# Altium PCB ATmega1284p_breakout.PcbDoc
Units mil, origin at the board's own origin, x right, y up, seen from the top; angles counter-clockwise.
Board outline 2600 x 4350 mil, 2 copper layers (Top Layer, Bottom Layer); 30 components, 44 nets, 167 pads, 48 vias.
Unrouted connection lines stored in the file: 51.
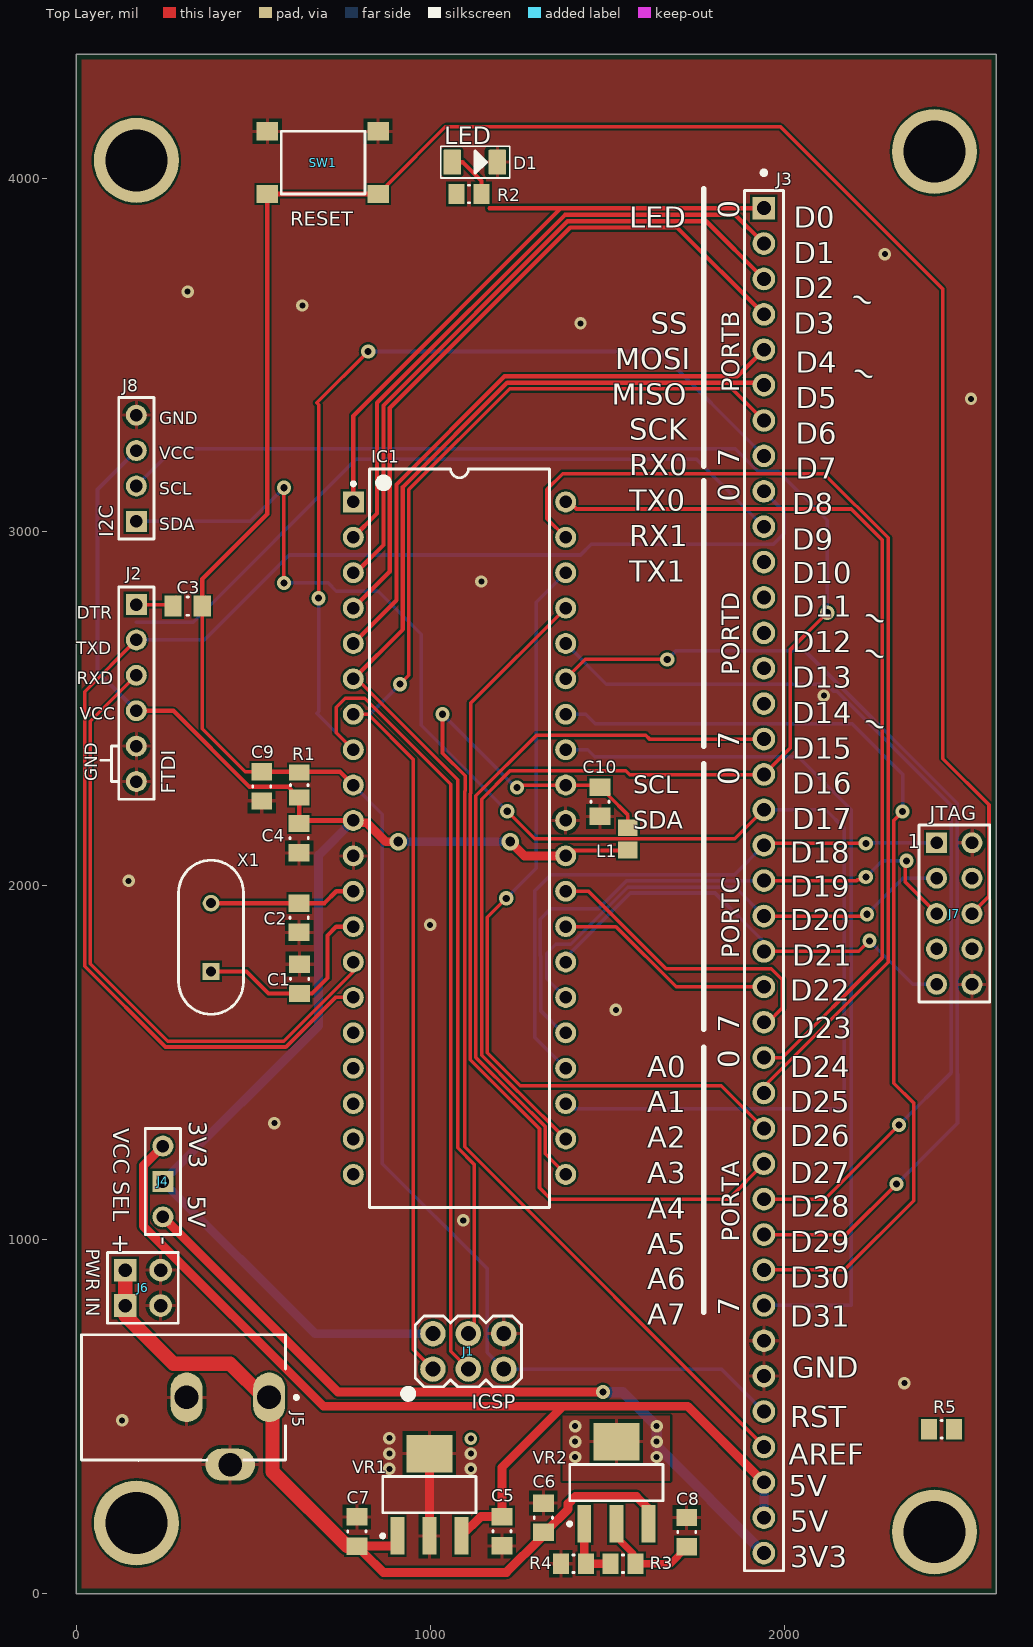
[diagram p0: Top Layer view]
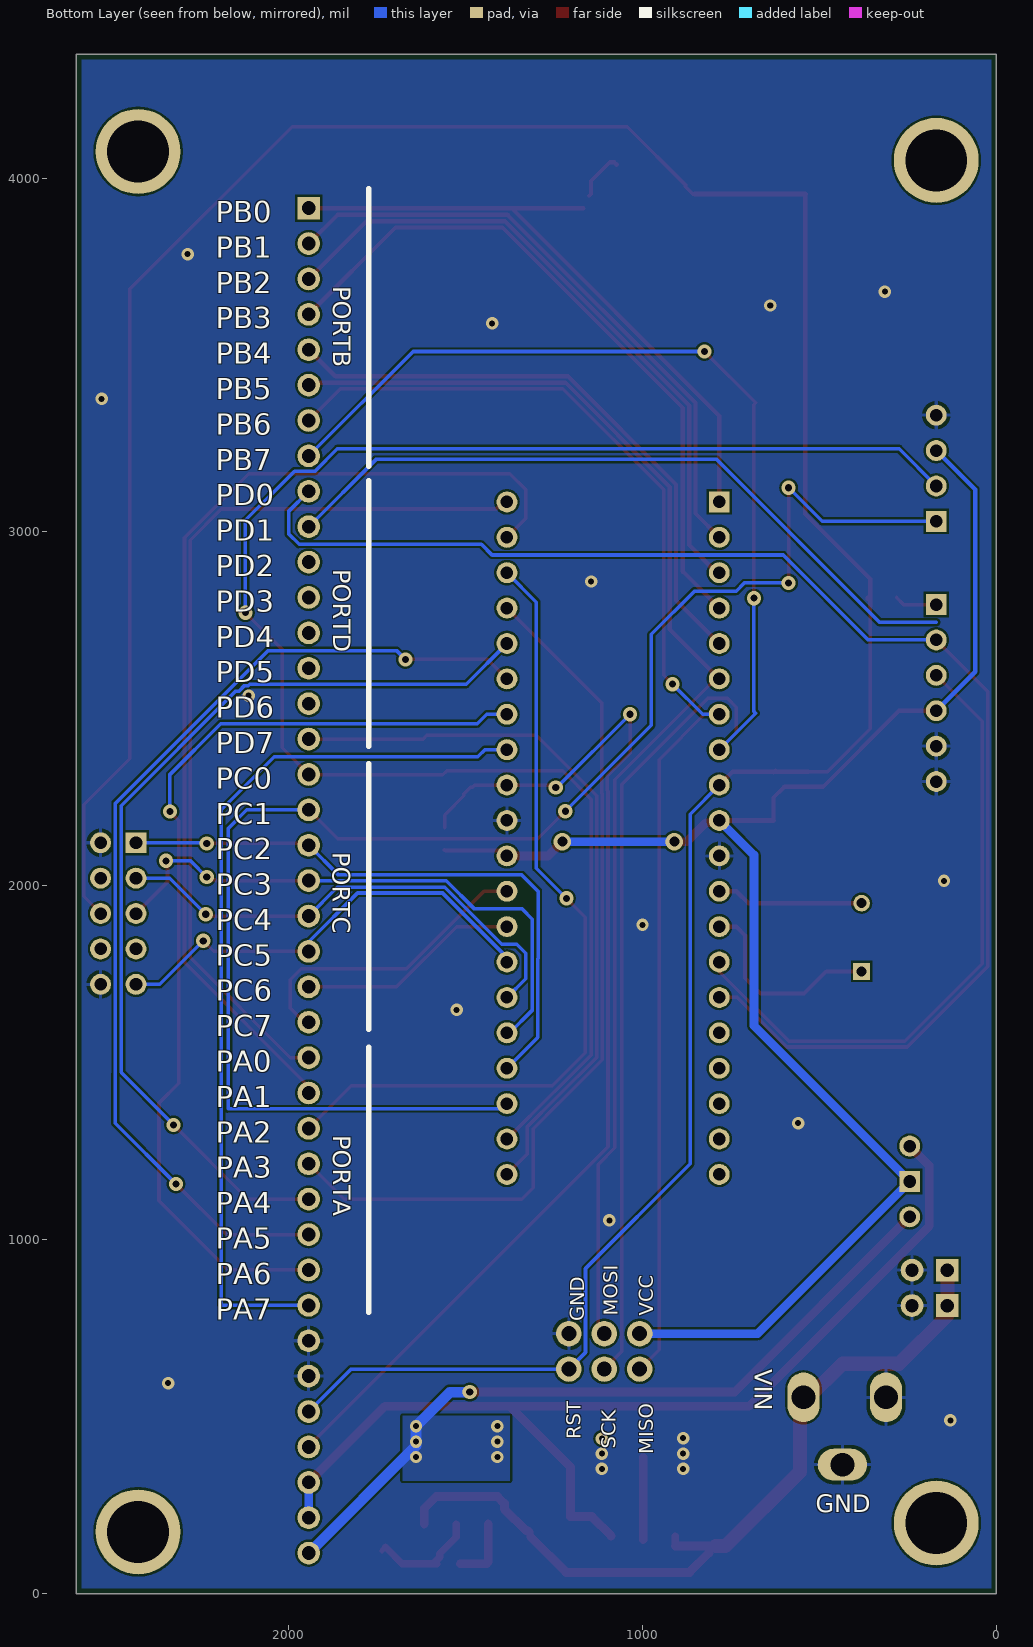
[diagram p1: Bottom Layer view, seen from below]

## Layer stack, top to bottom
Top Solder: solder mask 0.4, Solder Resist, Dk 3.5
Top Layer: signal copper 1.4
Dielectric 1: dielectric 12.6, FR-4, Dk 4.8
Bottom Layer: signal copper 1.4
Bottom Solder: solder mask 0.4, Solder Resist, Dk 3.5

## Board outline
0,0 2600,0 2600,4350 0,4350

## Design rules (kind name [scope] priority, off if disabled: settings)
BoardOutlineClearance [All] p1: gap=15 ignorepadtopadclearanceinfootprint=FALSE
Clearance [All] p1: gap=6 ignorepadtopadclearanceinfootprint=FALSE
PolygonConnect [IsVia] p1: connectstyle=Direct reliefconductorwidth=10 reliefentries=4 polygonreliefangle="90 Angle" airgapwidth=10
PolygonConnect PolygonConnect_1 [All] p2: connectstyle=Relief reliefconductorwidth=10 reliefentries=4 polygonreliefangle="90 Angle" airgapwidth=10
RoutingVias [All] p1: holewidth=28 width=50 viastyle="Through Hole" minholewidth=28 minwidth=50 maxholewidth=28 maxwidth=50
SolderMaskExpansion [All] p1: expansion=4
Width [All] p1: maxlimit=100 minlimit=10 preferedwidth=10
30 further rules are at their usual default settings.

## Components (designator, comment, footprint, x,y, rotation, side; value= is the part's Value field where it differs from the comment)
C1 "Cap Semi" RESC0805(2012)_M 631.34,1737.46 r270 top value=22pF
C2 "Cap Semi" RESC0805(2012)_M 630,1910 r90 top value=22pF
C3 "Cap Semi" RESC0805(2012)_M 315,2790.47 r0 top value=100n
C4 "Cap Semi" RESC0805(2012)_M 630,2135 r90 top value=100n
C5 "Cap Semi" RESC0805(2012)_M 1202.99,176.97 r90 top value=100n
C6 "Cap Semi" RESC0805(2012)_M 1320,215 r270 top value=100n
C7 "Cap Semi" RESC0805(2012)_M 792.99,176.34 r270 top value=100n
C8 "Cap Semi" RESC0805(2012)_M 1725,174.37 r270 top value=100n
C9 "Cap Semi" RESC0805(2012)_M 524.33,2281.34 r90 top value=10nF
C10 "Cap Semi" RESC0805(2012)_M 1480,2238.03 r90 top value=100n
D1 "LED" LED-0805 1105,4045 r0 top
IC1 "ATmega1284P-PU" 40P6 1082.99,2135 r0 top locked
J1 "ICSP" ICSP 1007.99,635 r180 top
J2 "FTDI" HDR1X6 170,2795 r270 top
J3 "Header38" HEADER38 1942.99,3815 r0 top locked
J4 "VCC SEL" HDR1X3 245,1065 r90 top
J5 "DC-005" BARREL 435,555 r270 top
J6 "PWR IN" HDR2X2 138.47,914.45 r270 top
J7 "JTAG" HDR2X5 2431,2122 r270 top
J8 "I2C" HDR1X4 170,3030 r90 top
L1 "Inductor" 2029 1559,2133.03 r90 top value=10mH
R1 "RES_0805" CAPC0805(2012)75_N 630,2285 r270 top value=10k
R2 "RES_0805" CAPC0805(2012)75_N 1110,3955 r180 top value=330
R3 "RES_0805" CAPC0805(2012)75_N 1545,84.9 r0 top value=2k
R4 "RES_0805" CAPC0805(2012)75_N 1405,85 r0 top value=3k
R5 "RES_0805" CAPC0805(2012)75_N 2445,465 r0 top value=IM
SW1 "RESET" TACT_SW 540,4132.17 r0 top
VR1 "LDL1117S50R" SOT223_M 997.99,280 r90 top
VR2 "LM117" SOT223_M 1526.1,313.86 r90 top
X1 "16MHz" CRYSTAL 381.04,1855 r90 top

## Footprints (in the part's own frame and the unit in brackets; to place one, negate y for a bottom-side part, rotate by r counter-clockwise, add the part's x,y. Pads: shape width x height; smd on the part's side, far side on the other; paste and mask are expansions set on the pad)
40P6 [mm] "40-Pin Ceramic Dual In-Line Package (CerDIP)"
  rect 1.5x1.5 hole 0.9: 1(-7.62,24.13)
  round 1.5 hole 0.9: 2(-7.62,21.59) 3(-7.62,19.05) 4(-7.62,16.51) 5(-7.62,13.97) 6(-7.62,11.43) 7(-7.62,8.89) 8(-7.62,6.35) 9(-7.62,3.81) 10(-7.62,1.27) 11(-7.62,-1.27) 12(-7.62,-3.81) 13(-7.62,-6.35) 14(-7.62,-8.89) 15(-7.62,-11.43) 16(-7.62,-13.97) 17(-7.62,-16.51) 18(-7.62,-19.05) 19(-7.62,-21.59) 20(-7.62,-24.13) 21(7.62,-24.13) 22(7.62,-21.59) 23(7.62,-19.05) 24(7.62,-16.51) 25(7.62,-13.97) 26(7.62,-11.43) 27(7.62,-8.89) 28(7.62,-6.35) 29(7.62,-3.81) 30(7.62,-1.27) 31(7.62,1.27) 32(7.62,3.81) 33(7.62,6.35) 34(7.62,8.89) 35(7.62,11.43) 36(7.62,13.97) 37(7.62,16.51) 38(7.62,19.05) 39(7.62,21.59) 40(7.62,24.13)
  silkscreen extent -7.74,-26.5 6.45,26.5, body extent -7.05,-26.47 7.05,26.47, height 4.83
2029 [mm] "Chip Inductor, Body 2.0x1.2mm, IPC High Density"
  rect 1.2x1.4 smd: 1(-0.8,0) 2(0.8,0)
  body extent -1.1,-0.7 1.1,0.7, height 0.55
BARREL [mil]
  oval 140x90 hole 67: 1(0,110) 2(0,-123.03)
  oval 90x140 hole 67: 3(190,0)
  silkscreen extent -177,-420 178,192, body extent -175,-456 195,142, height 433
CAPC0805(2012)75_N [mm] "Chip Capacitor, Body 2.0x1.2mm, Height 0.75mm, IPC Medium Density"
  rect 1.15x1.45 smd: 1(-0.9,0) 2(0.9,0)
  silkscreen extent -0.05,-0.62 0.05,0.62, body extent -1.51,-0.72 1.49,0.73, height 0.75
CRYSTAL [mm]
  rect 1.2x1.2 hole 0.7: 1(-2.45,0)
  round 1.2 hole 0.7: 2(2.45,0)
  silkscreen extent -5.53,-2.32 5.53,2.32, body extent -5.53,-2.33 5.52,2.32, height 3.5
HDR1X3 [mm] "Connector; Header; 3 Position"
  round 1.5 hole 0.9: 1(0,0) 3(5.08,0)
  rect 1.5x1.5 hole 0.9: 2(2.54,0)
  silkscreen extent -1.27,-1.27 6.35,1.27
HDR1X4 [mm] "Connector; Header; 4 Position"
  rect 1.5x1.5 hole 0.9: 1(0,0)
  round 1.5 hole 0.9: 2(2.54,0) 3(5.08,0) 4(7.62,0)
  silkscreen extent -1.27,-1.27 8.89,1.27
HDR1X6 [mm] "Connector; Header; 6 Position"
  rect 1.5x1.5 hole 0.9: 1(0,0)
  round 1.5 hole 0.9: 2(2.54,0) 3(5.08,0) 4(7.62,0) 5(10.16,0) 6(12.7,0)
  silkscreen extent -1.27,-1.27 13.97,1.27
HDR2X2 [mil] "Connector; Header; 2x2 Position"
  rect 64x64 hole 38: 1(0,0) 3(100,0)
  round 64 hole 38: 2(0,100) 4(100,100)
  silkscreen extent -50,-50 150,150
HDR2X5 [mm] "Connector; Header; 5x2 Position"
  rect 1.5x1.5 hole 0.9: 1(0,0)
  round 1.5 hole 0.9: 2(0,2.54) 3(2.54,0) 4(2.54,2.54) 5(5.08,0) 6(5.08,2.54) 7(7.62,0) 8(7.62,2.54) 9(10.16,0) 10(10.16,2.54)
  silkscreen extent -1.27,-1.27 11.43,3.81
HEADER38 [mil]
  rect 64x64 hole 39: 0(0,100)
  round 64 hole 39: 1(0,0) 2(0,-100) 3(0,-200) 4(0,-300) 5(0,-400) 6(0,-500) 7(0,-600) 8(0,-700) 9(0,-800) 10(0,-900) 11(0,-1000) 12(0,-1100) 13(0,-1200) 14(0,-1300) 15(0,-1400) 16(0,-1500) 17(0,-1600) 18(0,-1700) 19(0,-1800) 20(0,-1900) 21(0,-2000) 22(0,-2100) 23(0,-2200) 24(0,-2300) 25(0,-2400) 26(0,-2500) 27(0,-2600) 28(0,-2700) 29(0,-2800) 30(0,-2900) 31(0,-3000) 32(0,-3100) 33(0,-3200) 34(0,-3300) 35(0,-3400) 36(0,-3500) 37(0,-3600) 38(0,-3700)
  silkscreen extent -55,-3750 55,206
ICSP [mil]
  round 72 hole 42: 1(0,0) 2(0,-100) 3(-100,0) 4(-100,-100) 5(-200,0) 6(-200,-100)
  silkscreen extent -250,-150 80,80
LED-0805 [mil]
  rrect10% 50x70 smd: +(-42.4,0) -(85,0)
  silkscreen extent -75,-45 120,45
RESC0805(2012)_M [mm] "Chip Resistor, Body 2.0x1.3mm, IPC Low Density"
  rect 1.25x1.5 smd: 1(-1.05,0) 2(1.05,0)
  silkscreen extent -0.05,-0.65 0.05,0.65, body extent -1.1,-0.67 1.1,0.67, height 0.7
SOT223_M [mm]
  rect 2.7x1 smd: 1(-2.95,2.3) 2(-2.95,0) 3(-2.95,-2.3)
  rect 2.7x3.3 smd: 4(2.95,0)
  silkscreen extent -3.07,-3.35 1.3,3.47, body extent -1.85,-3.35 1.85,3.35, height 1.7
TACT_SW [mm]
  rect 1.55x1.3 smd: 1(0,0) 2(7.95,0) 3(7.95,-4.5) 4(0,-4.5)
  silkscreen extent 1,-4.5 7,0

## Part data
C1 C2 C3 C4 C5 C6 C7 C8 C9 C10: "Capacitor (Semiconductor SIM Model)", PackageDescription="Chip Capacitor", PackageReference=C1206
D1: library part SMD-LED-CLEAR-RED(0805), MPN=17-215SURC/S530-A2/TR8
IC1: "8-bit AVR Microcontroller, 128KB Flash, 4KB EEPROM, 16KB SRAM, 40-pin PDIP, Industrial Grade (-40°C to 85°C)", Code_JEDEC=MS-011-AC, ComponentLink1Description="Manufacturer URL", ComponentLink1URL=http://www.atmel.com/, ComponentLink2Description="ATmega164A/164PA/324A/324PA/644A/644PA/1284/1284P Datasheet", ComponentLink2URL=http://www.atmel.com/dyn/resources/prod_documents/doc8272.pdf, ComponentLink3Description="ATmega164A/164PA/324A/324PA/644A/644PA/1284/1284P Summary", ComponentLink3URL=http://www.atmel.com/dyn/resources/prod_documents/8272S.pdf, DatasheetVersion="revC, Jun-2011", PackageDescription="40-lead (0.600\"/15.24mm Wide) Plastic Dual Inline Package (PDIP)", PackageReference=40P6, PackageVersion="revB, Sep-2001"
J1: "In-Circuit Serial Programming Header"
J2: library part MHDR1X6, "Header, 6-Pin", LatestRevisionDate=17-Jul-2002, LatestRevisionNote="Re-released for DXP Platform.", Publisher="Altium Limited"
J3: library part Component_1
J4: library part "Header 3", "Header, 3-Pin", LatestRevisionDate=17-Jul-2002, LatestRevisionNote="Re-released for DXP Platform.", Publisher="Altium Limited"
J5: library part "DC BARREL"
J6: library part "Header 2X2", "Header, 2-Pin, Dual row", LatestRevisionDate=17-Jul-2002, LatestRevisionNote="Re-released for DXP Platform.", Publisher="Altium Limited"
J7: library part "Header 5X2", "Header, 5-Pin, Dual row", LatestRevisionDate=17-Jul-2002, LatestRevisionNote="Re-released for DXP Platform.", Publisher="Altium Limited"
J8: library part "Header 4", "Header, 4-Pin", LatestRevisionDate=17-Jul-2002, LatestRevisionNote="Re-released for DXP Platform.", Publisher="Altium Limited"
SW1: library part TACT_SW
VR1: library part LM317, "Fixed 5V Voltage Regulator", MFR=TI, MPN=LM340MP-5.0, ComponentLink1Description=Datasheet, ComponentLink1URL=http://www.ti.com/general/docs/lit/getliterature.tsp?genericPartNumber=tlv1117-50&fileType=pdf
VR2: library part LM317, "Adjustable Voltage Regulator", MFR=TI, MPN=LM340MP-5.0, ComponentLink1Description=Datasheet, ComponentLink1URL=http://www.ti.com/general/docs/lit/getliterature.tsp?genericPartNumber=tlv1117-50&fileType=pdf
X1: library part XTAL-HC
L1: Code_IEC=1005, Code_JEITA=0402, LatestRevisionDate=29-May-2009, LatestRevisionNote="IPC-7351 Footprint Added.", PackageDescription="Chip Inductor", PackageReference=0402-A, Published=8-Jun-2000, Publisher="Altium Limited"

## Free pads (board coordinates)
  round 240 hole 175: 0(170,200) 0(170,4050) 0(2425,175) 0(2425,4075)

## Via types
v1: diameter 35, hole 17, Top Layer to Bottom Layer, tented both sides, 26 vias
v2: diameter 40, hole 20, Top Layer to Bottom Layer, tented both sides, 19 vias
v3: diameter 50, hole 28, Top Layer to Bottom Layer, tented both sides, 2 vias
v4: diameter 40, hole 20, Top Layer to Bottom Layer, tented bottom, 1 vias

## Nets (pads, with @x,y where several pads share a name; then routed paths per layer and width w, separated by ;. In a path a pad name is that pad's centre, name@x,y a point inside that pad or via, vN(x,y) a via of type N, cw(c..) or ccw(c..) an arc to the next point about the centre after c; other vN are vias at no path point)
3V3: C8.2 J3.38 J4.1 R3.2 VR2.2 VR2.4 | length 2442.6
  Top Layer w15: C8.2 1726.22,131.81 C8.2@1736.14,121.89
  Top Layer w20: VR2.2 1526.1,160.87 1572.8,114.17 1572.8,103.45 1585.43,90.81 R3.2@1585.43,84.9 ; R3.2 R3.2@1585.43,84.9 ; C8.2@1726.22,131.81 1679.31,84.9 R3.2@1585.43,84.9
  Top Layer w25: J4.1 740,570 v4(1487.99,570)
  Bottom Layer w30: v4(1487.99,570) 1543.85,570 v1(1640,473.85) 1640,417.99 J3.38
  other v1: 1410,386.69 1640,386.69 1410,430 1640,430 1410,473.85
5V: C5.2 J3.36 J3.37 J4.3 VR1.3 | length 2921.5
  Top Layer w25: J4.3 190,1210 190,1038.82 698.82,530 1727.99,530 J3.36 ; VR1.3 1142.99,218.31 C5.2 1202.99,357.2 1375.39,529.61
  Bottom Layer w25: J3.37 J3.36
\R\E\S\E\T: C3.2 C9.2 IC1.9 J1.5 J3.34 J7.6 R1.1 SW1.3 SW1.4 | length 8722.2
  Top Layer w10: C3.2 356.34,2443.66 477.32,2322.68 C9.2@532.32,2322.68 ; C3.2@364.68,2810.08 C3.2@364.68,2815 ; R1.1@624.1,2326.34 R1.1 ; SW1.3 857.91,3955 878.5,3975.59 878.5,3980.51 1042.99,4145 1990,4145 2448.5,3686.5 2448.5,2359.5 2579,2229 2579,1971 2531,1923 J7.6
  Top Layer w12: C3.2 356.34,2867.39 540,3051.06 SW1.4 ; C9.2@532.32,2322.68 745.32,2322.68 IC1.9
  Top Layer w15: SW1.4 SW1.3
  Bottom Layer w10: IC1.9 865,2202.99 865,1215 1160.99,919.01 1160.99,682 J1.5 1822.99,635 J3.34
\S\S: IC1.5 J3.4 | length 1695.6
  Top Layer w12: IC1.5 905,2807.01 905,3134.5 1210.5,3440 1867.99,3440 J3.4
AIN0: IC1.3 J3.2 | length 1869.9
  Top Layer w12: IC1.3 790,2885 868,2963 868,3357.54 1388.46,3878 1779.99,3878 J3.2
AIN1: IC1.4 J3.3 | length 1977.4
  Top Layer w12: IC1.4 886,2888.01 886,3350.09 1395.91,3860 1697.99,3860 J3.3
AREF: C10.2 IC1.32 J3.35 L1.2 | length 3133.8
  Top Layer w10: v2(1035,2485) 1035,2375 1099,2311 1099,2269.25 1097.39,2267.65 1097.39,1263.23 1942.99,417.63 J3.35 ; v2(1245,2278.03) 1251.97,2285 IC1.32 1474.37,2285 C10.2 1484.92,2279.37 1504.53,2259.76 1504.53,2254.84 1559,2200.37 L1.2
  Bottom Layer w10: v2(1035,2485) 1241.97,2278.03 v2(1245,2278.03)
D12: IC1.18 J3.12
D13: IC1.19 J3.13
D14: IC1.20 J3.14
D15: IC1.21 J3.15 | length 2063.6
  Top Layer w10: IC1.21 1325,1242.99 1325,1320.36 1242.36,1403 1241.75,1403 1129.39,1515.35 1129.39,2254.39 1300.53,2425.53 1609.19,2425.53 1619.72,2415 J3.15
D16_SCL: IC1.22 J3.16 J8.2 | length 4766.5
  Top Layer w10: IC1.22 1248.99,1419 1248.37,1419 1145.39,1521.98 1145.39,2245.39 1225.53,2325.53 1552.47,2325.53 1564,2314 1927.38,2314 1928.38,2315 J3.16 2018,2390.01 2018,2668 v2(2122,2772)
  Bottom Layer w10: J8.2 275,3235 1862.18,3235 1925.18,3172 1983,3172 2122,3033 v2(2122,2772)
D17_SDA: IC1.23 J3.17 J8.1 | length 4400.9
  Top Layer w10: v2(587,2856) v2(587,3125) ; v2(1218,2211) 1295.97,2133.03 1861.02,2133.03 J3.17
  Bottom Layer w10: J8.1 492,3030 v2(587,3125) ; v2(587,2856) 712,2856 735,2833 853,2833 975,2711 975,2454 v2(1218,2211) ; IC1.23 1397.99,1370 2170.6,1370 2170.6,2162.4 2118,2215 J3.17
D18_TCK: IC1.24 J3.18 J7.1 | length 1729.2
  Top Layer w10: J3.18 1947.99,2120 v2(2231,2120)
  Bottom Layer w10: IC1.24 1296,1571.99 1296,1794.62 1295,1795.62 1295,1985 1341,2031 1858.99,2031 J3.18 ; v2(2231,2120) 2233,2122 J7.1
D19_TMS: IC1.25 J3.19 J7.5 | length 1646.4
  Top Layer w10: J3.19 2205.14,2015 2207.49,2017.35 2223.35,2017.35 v2(2231,2025) ; v2(2346,2071) 2342,2067 2342,2011 J7.5
  Bottom Layer w10: IC1.25 1375,1585 1312,1648 1312,1801.25 1311,1802.25 1311,1906 1340,1935 1474.75,1935 1554.75,2015 J3.19 ; v2(2231,2025) 2277,2071 v2(2346,2071)
D20_TDO: IC1.26 J3.20 J7.3 | length 1402.9
  Top Layer w10: J3.20 2229,1915 v2(2234,1920)
  Bottom Layer w10: IC1.26 1330,1737.99 1330,1810 1355,1835 1397.37,1835 1558.37,1996 1861.99,1996 J3.20 ; v2(2234,1920) 2336,2022 J7.3
D21_TDI: IC1.27 J3.21 J7.9 | length 1283.9
  Top Layer w10: J3.21 2211,1815 v2(2241,1845)
  Bottom Layer w10: IC1.27 1382.99,1797.99 1565,1980 1805,1980 1942.99,1842.01 J3.21 ; v2(2241,1845) 2364,1722 J7.9
D22: IC1.28 J3.22 | length 630.4
  Top Layer w10: IC1.28 1525,1885 1695,1715 J3.22
D23: IC1.29 J3.23 | length 864.1
  Top Layer w10: IC1.29 1447.63,1985 1666.63,1766 1964,1766 1995,1735 1995,1655 1955,1615 J3.23
D24/A0: IC1.40 J3.24 | length 2571
  Top Layer w10: IC1.40 1393.38,3085 1413.38,3065 2190,3065 2278,2977 2278,1798 1995,1515 J3.24
D25/A1: IC1.39 J3.25 | length 2928.7
  Top Layer w10: IC1.39 1330,3037.99 1330,3120 1375,3165 2112.63,3165 2294,2983.63 2294,1784 1942.99,1432.99 J3.25
D26/A2: IC1.38 J3.26 | length 2318.3
  Top Layer w10: v2(1215,1965) 1161.39,1911.39 1161.39,1528.61 1255,1435 1822.99,1435 J3.26
  Bottom Layer w10: v2(1215,1965) 1300,2050 1300,2802.01 IC1.38
D27/A3: IC1.37 J3.27 | length 2519.8
  Top Layer w10: IC1.37 1115,2517.01 1115,2262.63 1113.39,2261.02 1113.39,1508.72 1235.12,1387 1235.74,1387 1309,1313.74 1309,1146.86 1340.86,1115 1842.99,1115 J3.27
D28/A4: IC1.36 J3.28 | length 2712
  Top Layer w10: J3.28 2115,1115 v2(2325,1325)
  Bottom Layer w10: IC1.36 1497.99,2570 2110,2570 2113.77,2566.23 2124.43,2566.23 2141.13,2549.54 2150.46,2549.54 2473,2227 2473,1473 v2(2325,1325)
D29/A5: IC1.35 J3.29 | length 2899.4
  Top Layer w10: IC1.35 1437.99,2640 v2(1670,2640) ; J3.29 2175,1015 v2(2318,1158)
  Bottom Layer w10: v2(1670,2640) 1695,2665 2057.63,2665 2489,2233.63 2489,1468.37 2490,1467.37 2490,1330 v2(2318,1158)
D30/A6: IC1.34 J3.30 | length 2764.2
  Top Layer w10: J3.30 2170,915 2366,1111 2366,1386.84 2310,1442.84 2310,2185 v2(2335,2210)
  Bottom Layer w10: IC1.34 1440,2485 1467,2458 2192,2458 2335,2315 v2(2335,2210)
D31/A7: IC1.33 J3.31 | length 2524.4
  Bottom Layer w10: IC1.33 1445,2385 1465,2365 2040,2365 2190,2215 2190,815 J3.31
GND: C1.1 C2.1 C4.1 C5.1 C6.1 C7.1 C8.1 C9.1 C10.1 D1.- IC1.11 IC1.31 J1.6 J2.5 J2.6 J3.32 J3.33 J5.2 J5.3 J6.2 J6.4 J7.2 J7.10 J8.4 R4.1 SW1.1 SW1.2 VR1.2 VR1.4 | length 232.3
  Top Layer w25: VR1.2@997.99,153.54 VR1.4@997.99,385.83
  other v1: 885,352.83 1115,352.83 885,396.14 1115,396.14 885,440 130,490 2340,595 1093.62,1055 560,1330 1525,1650 1000,1890 148,2014.21 2112.63,2537.73 1145,2860 2528.02,3376 1425,3589.6 639,3640 315,3679 2285,3785
MISO: IC1.7 J1.1 J3.6 | length 3853.7
  Top Layer w10: IC1.7 825,2485 952.99,2357.01 952.99,690 J1.1 ; v2(915,2570) 940,2595 940,3120 1225,3405 1852.99,3405 J3.6
  Bottom Layer w10: IC1.7 830,2485 v2(915,2570)
MOSI: IC1.6 J1.4 J3.5 | length 3749.7
  Top Layer w10: IC1.6 792.99,2585 1077.99,2300 1077.99,1260 1125,1212.99 1125,752.01 J1.4
  Top Layer w12: IC1.6 923,2725.01 923,3127.04 1217.96,3422 1935.99,3422 J3.5
NetC1_2: C1.2 IC1.13 R5.2 X1.1 | length 576.3
  Top Layer w12: X1.1 481.02,1758.54 543.44,1696.12 C1.2 666.12,1696.12 710,1740 710,1860 735,1885 IC1.13
NetC2_2: C2.2 IC1.12 R5.1 X1.2 | length 415.9
  Top Layer w12: X1.2 381.16,1951.34 C2.2 701.34,1951.34 735,1985 IC1.12
NetC3_1: C3.1 J2.1 | length 120.5
  Top Layer w10: J2.1 262.4,2795 282.01,2814.61 C3.1@282.01,2815
NetD1_+: D1.+ R2.1 | length 136.7
  Top Layer w10: R2.1@1149.4,3950 R2.1@1151.46,3950
  Top Layer w12: D1.+@1072.6,4037.5 1080.1,4045 1091.97,4045 1145.43,3991.54 R2.1
NetIC1_1: IC1.1 J3.0 R2.2 | length 1848.5
  Top Layer w12: IC1.1 782.99,3327.99 1370,3915 ; 1167.6,3915 1370,3915 ; J3.0 1370,3915
NetIC1_2: IC1.2 J3.1 | length 1754.2
  Top Layer w12: IC1.2 850,3052.01 850,3365 1381,3896 1861.99,3896 J3.1
NetR3_1: R3.1 R4.2 VR2.1 | length 188.9
  Top Layer w25: VR2.1 1435.55,89.88 R4.2 1514.47,85 R3.1@1514.57,84.9
RXD0: IC1.14 J2.3 J3.8 | length 3909
  Top Layer w10: J2.3 40,2465 40,1780 259,1561 586,1561 782.99,1757.99 IC1.14
  Bottom Layer w10: 170,2695 362.35,2695 602.35,2935 1425,2935 1455,2965 1970,2965 2000,2995 2000,3057.99 J3.8
RXD1: IC1.16 J3.10
SCK: IC1.8 J1.3 J3.7 | length 4718.6
  Top Layer w10: v2(685,2813) 685,3360 680,3365 v2(825,3510) ; IC1.8 735,2432.99 735,2505 760,2530 815,2530 1057.99,2287.01 1057.99,685 J1.3
  Bottom Layer w10: v2(685,2813) 685,2492.99 680,2487.99 IC1.8 ; v2(825,3510) 1647.99,3510 J3.7
TXD0: IC1.15 J2.2 J3.9 | length 3935.9
  Top Layer w10: J2.2 24,2549 24,1773.37 252.37,1545 592.63,1545 732.63,1685 IC1.15
  Bottom Layer w10: 170,2745 330.36,2745 790.36,3205 1752.99,3205 J3.9
TXD1: IC1.17 J3.11
VCC: C4.2 IC1.10 IC1.30 J1.2 J2.4 J4.2 J8.3 L1.1 R1.2 | length 4613.6
  Top Layer w12: J2.4 275,2495 490,2280 599.57,2280 R1.2 C4.2@630,2185 ; IC1.30 1397.99,2100 1557.46,2100 L1.1
  Top Layer w15: C4.2@630,2185 IC1.10
  Top Layer w25: IC1.10 789.38,2178.61 821.39,2178.61 875,2125 v3(910,2125) ; v3(1226.34,2125) 1266.34,2085 IC1.30
  Bottom Layer w12: J2.4 60,2605 60,3120 J8.3
  Bottom Layer w25: IC1.10 685,2087.01 685,1605 J4.2 675,735 J1.2 ; v3(910,2125) v3(1226.34,2125)
VIN: C6.2 C7.2 J5.1 J6.1 J6.3 VR1.1 VR2.3 | length 2261
  Top Layer w20: C7.2 797.91,135 812.52,120.39 C7.2@812.52,115.47 ; VR1.1@907.44,135 VR1.1
  Top Layer w25: C7.2@797.91,135 VR1.1@907.44,135 ; C7.2@812.52,115.47 867.6,60.39 1215.67,60.39 C6.2@1315,159.72 ; C6.2 1324.65,178.31 1328.86,178.31 1390,239.45 1390,255 1410,275 1582.68,275 1616.65,241.02 VR2.3
  Top Layer w40: J6.3@138.47,839.45 J6.1 ; J6.3@140,800 140,785 275,650 435,650 531.9,553.1 531.9,519.25 555,496.15 555,345 765,135 C7.2
pads on no net: J7.4 J7.7 J7.8
copper on no net:
  other v1: 1115,438.64

## Polygon pours and split planes (outlines as drawn)
3V3 on Top Layer "3V3_L01_P013" (solid, remove dead copper, pour order 13): 1374.53,502.83 1374.53,320 1677.68,320 1677.68,502.83
GND on Top Layer "GND_L01_P012" (solid, remove dead copper, pour order 12): 846.42,475 1149.57,475 1149.57,310 846.42,310
GND on Top Layer "GND_L01_P014" (solid, remove dead copper, pour order 14): 0,0 0,4350 2600,4350 2600,0
3V3 on Bottom Layer "3V3_L02_P016" (solid, remove dead copper, pour order 16): 1374.53,502.83 1374.53,320 1677.68,320 1677.68,502.83
GND on Bottom Layer "GND_L02_P017" (solid, remove dead copper, pour order 17): 0,0 0,4350 2600,4350 2600,0

## Silkscreen, mask and mechanical layers (free items; w line width, h text height)
Top Overlay:
  rectangle: 1128,4030 1149,4060
  lines w8: 70,2355 95,2355 100,2355 ; 120,2295 100,2295 100,2355 ; 120,2395 100,2395 100,2355
  lines w10: 1133,4028 1133,4065 ; 1144,4045 1155,4045 ; 1128,4015 1158,4045 1128,4075 1128,4015
  lines w15: 1772.99,795 1772.99,1545 ; 1772.99,1595 1772.99,2345 ; 1772.99,2395 1772.99,3145 ; 1772.99,3185 1772.99,3970.12
  text "LED" at 1040,4095 h50
  text "0" at 1872.99,3885 h60 r90
  text "LED" at 1562.99,3860 h60
  text "D0" at 2027.99,3860 h60
  text "D1" at 2027.99,3760 h60
  text "~" at 2262.99,3665 h60 r155
  text "D2" at 2027.99,3660 h60
  text "SS" at 1622.96,3560 h60
  text "D3" at 2027.99,3560 h60
  text "MOSI" at 1522.99,3460 h60
  text "~" at 2267.99,3455 h60 r155
  text "D4" at 2032.99,3450 h60
  text "PORTB" at 1872.99,3395 h50 r90
  text "MISO" at 1512.99,3360 h60
  text "D5" at 2032.99,3350 h60
  text "GND" at 235,3305 h35
  text "SCK" at 1562.98,3260 h60
  text "D6" at 2032.99,3250 h60
  text "VCC" at 235,3205 h35
  text "7" at 1872.99,3185 h60 r90
  text "RX0" at 1562.98,3160 h60
  text "D7" at 2032.99,3150 h60
  text "SCL" at 235,3105 h35
  text "0" at 1872.99,3085 h60 r90
  text "TX0" at 1562.98,3060 h60
  text "D8" at 2022.99,3050 h60
  text "SDA" at 235,3005 h35
  text "RX1" at 1562.98,2960 h60
  text "D9" at 2022.99,2950 h60
  text "TX1" at 1562.98,2860 h60
  text "D10" at 2022.99,2855 h60
  text "~" at 2297.99,2765 h60 r155
  text "D11" at 2022.99,2760 h60
  text "DTR" at 2.01,2755.08 h35
  text "~" at 2297.99,2665 h60 r155
  text "D12" at 2022.99,2660 h60
  text "TXD" at 0,2655 h35
  text "PORTD" at 1872.99,2595 h50 r90
  text "RXD" at 2.01,2570 h35
  text "D13" at 2022.99,2560 h60
  text "VCC" at 10,2470 h35
  text "~" at 2297.99,2465 h60 r155
  text "D14" at 2022.99,2460 h60
  text "7" at 1872.99,2385 h60 r90
  text "D15" at 2022.99,2360 h60
  text "GND" at 60,2296 h35 r90
  text "0" at 1872.99,2285 h60 r90
  text "SCL" at 1573.98,2262 h50
  text "D16" at 2022.99,2260 h60
  text "SDA" at 1574,2162 h50
  text "D17" at 2022.99,2160 h60
  text "D18" at 2017.99,2065 h60
  text "D19" at 2017.99,1970 h60
  text "D20" at 2017.99,1875 h60
  text "PORTC" at 1872.99,1795 h50 r90
  text "D21" at 2022.99,1775 h60
  text "D22" at 2017.99,1675 h60
  text "7" at 1872.99,1585 h60 r90
  text "D23" at 2022.99,1570 h60
  text "0" at 1872.99,1485 h60 r90
  text "A0" at 1612.99,1460 h60
  text "D24" at 2017.99,1460 h60
  text "A1" at 1612.99,1360 h60
  text "D25" at 2017.99,1360 h60
  text "3V3" at 320,1335 h50 r270
  text "D26" at 2017.99,1265 h60
  text "A2" at 1612.99,1260 h60
  text "A3" at 1612.99,1160 h60
  text "D27" at 2017.99,1160 h60
  text "5V" at 316.38,1125 h50 r270
  text "D28" at 2017.99,1065 h60
  text "A4" at 1612.99,1060 h60
  text "PORTA" at 1872.99,995 h50 r90
  text "D29" at 2017.99,965 h60
  text "A5" at 1612.99,960 h60
  text "D30" at 2017.99,865 h60
  text "A6" at 1612.99,860 h60
  text "7" at 1872.99,785 h60 r90
  text "A7" at 1612.99,760 h60
  text "D31" at 2017.99,755 h60
  text "GND" at 2022.99,610 h60
  text "RST" at 2017.99,470 h60
  text "AREF" at 2012.99,365 h60
  text "5V" at 2012.99,275 h60
  text "5V" at 2017.99,175 h60
  text "3V3" at 2017.99,75 h60
Bottom Overlay:
  lines w15: 1772.99,795 1772.99,1545 ; 1772.99,1595 1772.99,2345 ; 1772.99,2395 1772.99,3145 ; 1772.99,3185 1772.99,3970.12
  text "PB0" at 2205,3875 h60
  text "PB1" at 2205,3775 h60
  text "PORTB" at 1872.99,3695 h50 r90
  text "PB2" at 2205,3675 h60
  text "PB3" at 2205,3575 h60
  text "PB4" at 2205,3475 h60
  text "PB5" at 2205,3375 h60
  text "PB6" at 2205,3275 h60
  text "PB7" at 2205,3175 h60
  text "PD0" at 2205,3075 h60
  text "PD1" at 2205,2975 h60
  text "PORTD" at 1872.99,2895 h50 r90
  text "PD2" at 2205,2875 h60
  text "PD3" at 2205,2775 h60
  text "PD4" at 2205,2675 h60
  text "PD5" at 2205,2575 h60
  text "PD6" at 2205,2475 h60
  text "PD7" at 2205,2375 h60
  text "PC0" at 2205,2275 h60
  text "PC1" at 2205,2175 h60
  text "PORTC" at 1875,2095 h50 r90
  text "PC2" at 2205,2075 h60
  text "PC3" at 2205,1975 h60
  text "PC4" at 2205,1875 h60
  text "PC5" at 2205,1775 h60
  text "PC6" at 2205,1675 h60
  text "PC7" at 2205,1575 h60
  text "PA0" at 2205,1475 h60
  text "PA1" at 2205,1375 h60
  text "PORTA" at 1872.99,1295 h50 r90
  text "PA2" at 2205,1275 h60
  text "PA3" at 2205,1175 h60
  text "PA4" at 2205,1075 h60
  text "PA5" at 2205,975 h60
  text "PA6" at 2205,875 h60
  text "VCC" at 970,785 h40 r270
  text "MOSI" at 1070,785 h40 r270
  text "PA7" at 2205,775 h60
  text "GND" at 1165,770 h40 r270
  text "VIN" at 682.67,635 h50 r90
  text "RST" at 1175,436.65 h40 r270
  text "SCK" at 1075,410 h40 r270
  text "MISO" at 970,395 h40 r270
  text "GND" at 510,230.62 h50

## Text inside footprints (layer, text, board x,y; h text height)
J6: Top Overlay "-" at 263.47,984.45 h50 r90; Top Overlay "+" at 103.47,1017.77 h50 r270
J7: Top Overlay "1" at 2348.99,2107 h40